# Altium PCB wisp-6.PcbDoc
Units mil, origin at the board's own origin, x right, y up, seen from the top; angles counter-clockwise.
Board outline 1302.99 x 5829.89 mil, 4 copper layers (Top Layer, Mid-Layer 1, Mid-Layer 2, Bottom Layer); 65 components, 63 nets, 256 pads, 67 vias.
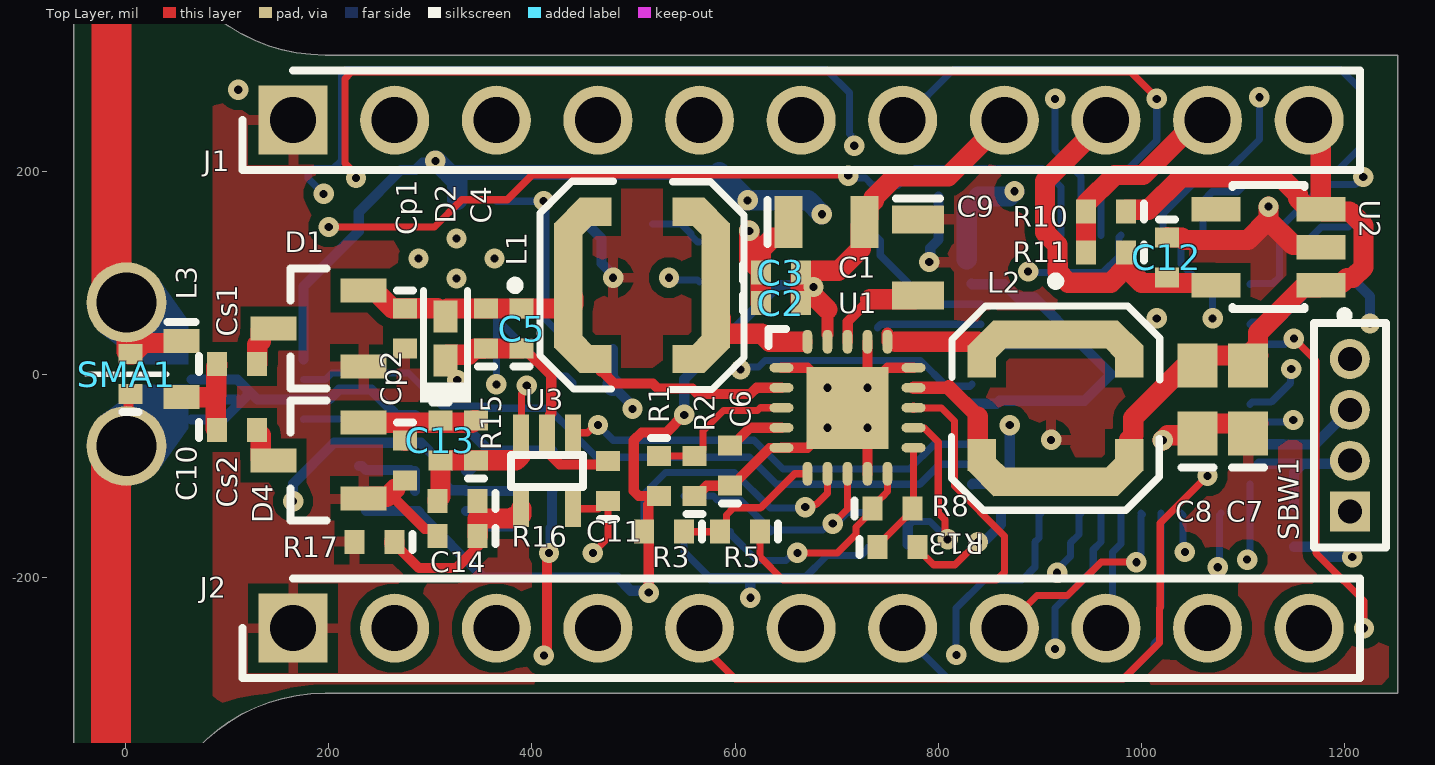
[diagram p0: Top Layer view]
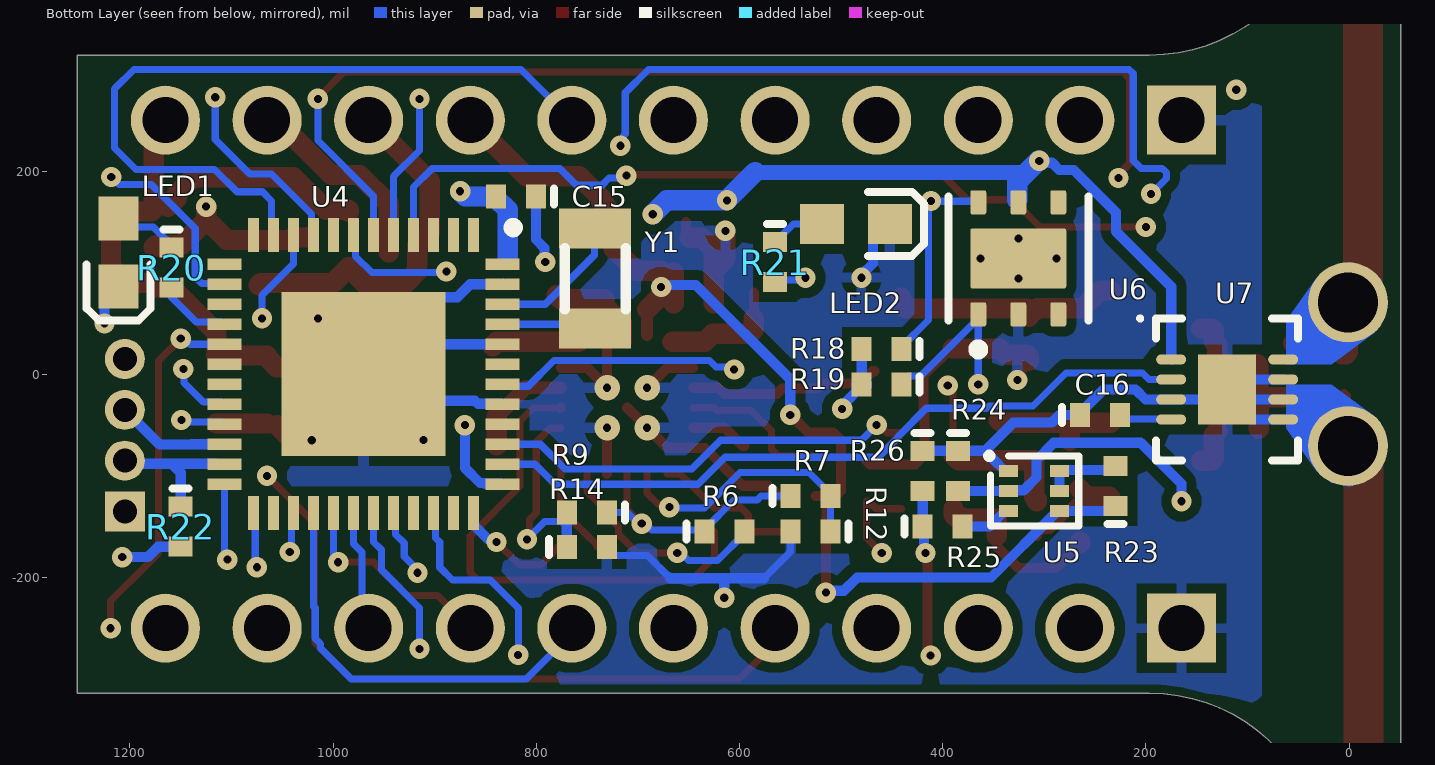
[diagram p1: Bottom Layer view, seen from below]
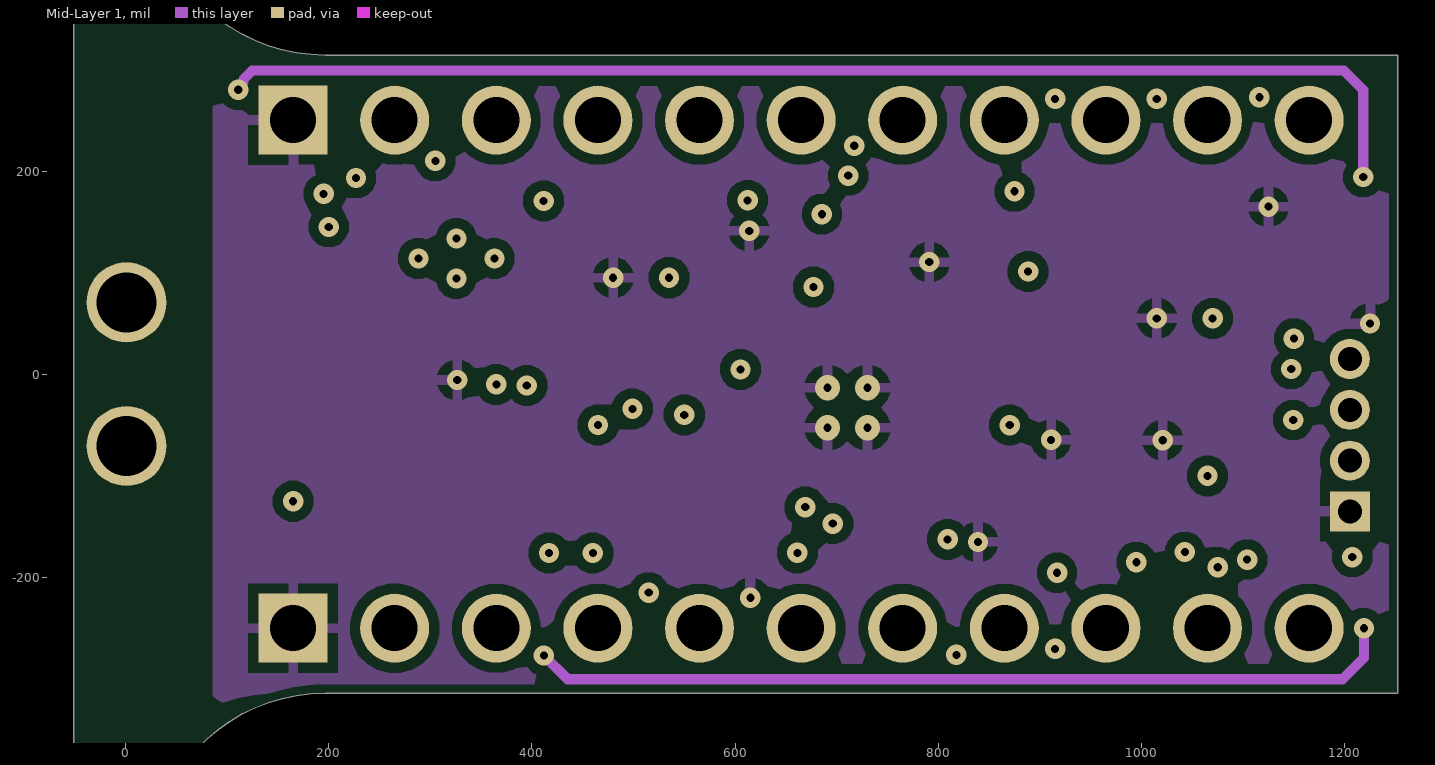
[diagram p2: Mid-Layer 1]
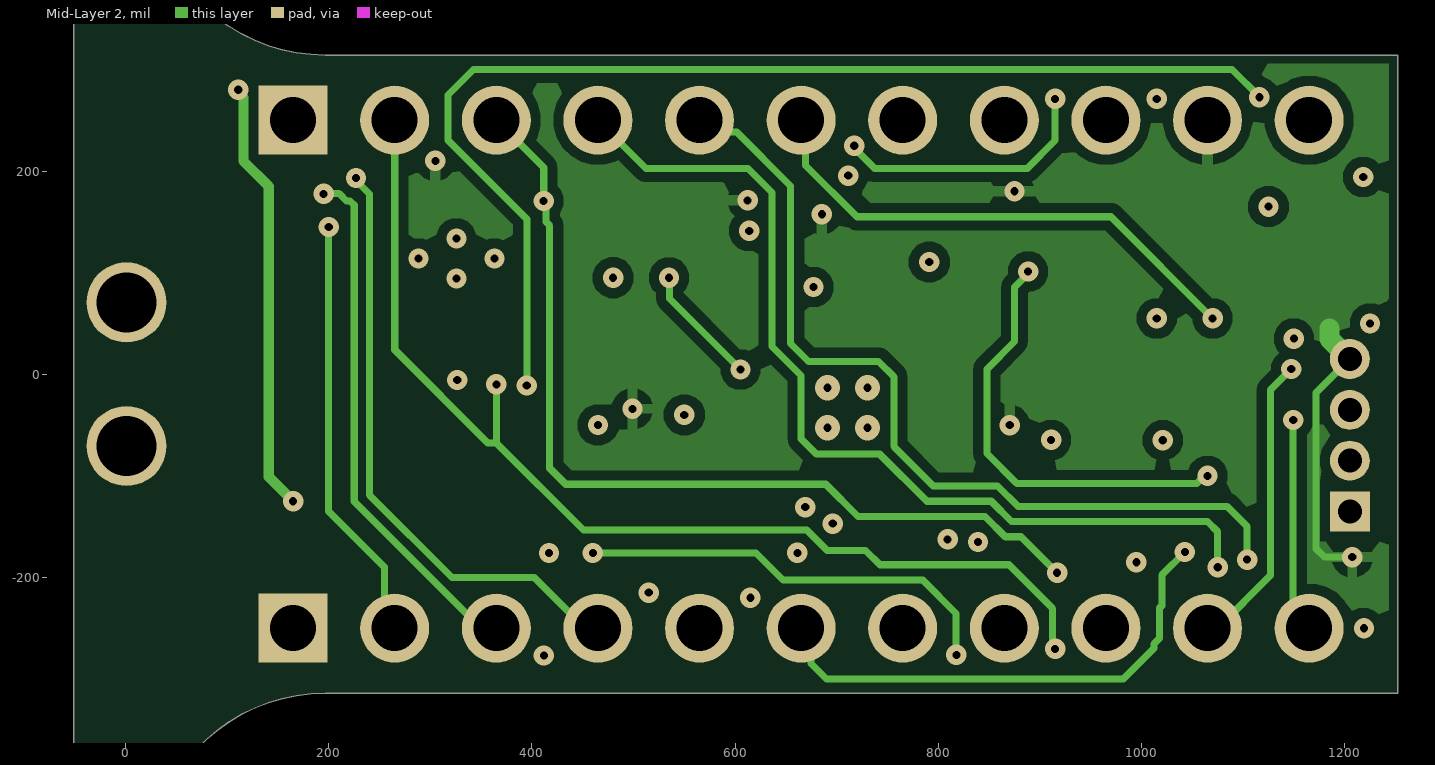
[diagram p3: Mid-Layer 2]

## Layer stack, top to bottom
Top Solder: solder mask 0.4, Solder Resist, Dk 3.5
Top Layer: signal copper 1.4
Dielectric 1: dielectric 12.6, FR-4, Dk 4.8
Mid-Layer 1: signal copper 1.4
Dielectric3: dielectric 12.6, FR-4, Dk 4.8
Mid-Layer 2: signal copper 1.4
Dielectric2: dielectric 12.6, FR-4, Dk 4.8
Bottom Layer: signal copper 1.4
Bottom Solder: solder mask 0.4, Solder Resist, Dk 3.5

## Board outline
-50.99,-2875.73 -50.99,2874.27 cw(c-13.49,2876.77) 24.01,2874.27 24.01,2874.28 24.01,486.61 ccw(c196.48,486.61) 196.48,314.15 1252,314.15 1252,-314.15 196.48,-314.15 196.48,-314.01 ccw(c196.48,-486.47) 24.01,-486.47 24.01,-2875.73 cw(c-13.49,-2878.23)

## Design rules (kind name [scope] priority, off if disabled: settings)
BoardOutlineClearance BoardOutlineClearance_1 [(OnLayer('Bottom Overlay') AND OnLayer('Top Overlay'))] p1: gap=8.5 ignorepadtopadclearanceinfootprint=FALSE except(5: Track-OutlineEdge Track-CavityEdge Track-CutoutEdge Track-SplitBarrior Track-SplitContinuation Text-OutlineEdge Text-CavityEdge Text-CutoutEdge Text-SplitBarrior Text-SplitContinuation)
BoardOutlineClearance [Not OnLayer('Bottom Overlay') AND  Not OnLayer('Top Overlay')] p2: gap=8.5 ignorepadtopadclearanceinfootprint=FALSE except(5: Text-OutlineEdge Text-CavityEdge Text-CutoutEdge Text-SplitBarrior Text-SplitContinuation)
Clearance [All] p1: gap=10 ignorepadtopadclearanceinfootprint=FALSE except(0: Arc-Hole Track-Hole SMDPad-Hole THPad-Hole Via-Hole Fill-Hole Poly-Hole Region-Hole Text-Hole; 5: Text-Text; 6: SMDPad-SMDPad; 8: Arc-Arc Arc-Track Arc-SMDPad Track-Track Track-SMDPad; 9: Arc-Via Track-Via SMDPad-Via)
HoleSize [All] p1: absolutevalues=TRUE maxlimit=248.03 minlimit=7.87 maxpercent=80.000 minpercent=20.000
HoleToHoleClearance [All] p1: gap=19.68 allowstackedmicrovias=TRUE
MinimumSolderMaskSliver [All] p1: minsoldermaskwidth=1
PolygonConnect [All] p1: connectstyle=Relief reliefconductorwidth=10 reliefentries=4 polygonreliefangle="90 Angle" airgapwidth=10
RoomDefinition wisp-6-main [InComponentClass('wisp-6-main')] p1 off: confinementstyle=ConfineIn formatcopy=TRUE lockcomponents=FALSE outline -170,-3950 1830,-3950 1830,-2950 -170,-2950
RoomDefinition U_wisp-6-peripherals [InComponentClass('U_wisp-6-peripherals')] p2 off: confinementstyle=ConfineIn formatcopy=TRUE lockcomponents=FALSE outline -170,-3950 1830,-3950 1830,-2950 -170,-2950
RoomDefinition U_wisp-6-mcu [InComponentClass('U_wisp-6-mcu')] p3 off: confinementstyle=ConfineIn formatcopy=TRUE lockcomponents=FALSE outline -170,-3950 1830,-3950 1830,-2950 -170,-2950
RoomDefinition U_wisp-6-afe [InComponentClass('U_wisp-6-afe')] p4 off: confinementstyle=ConfineIn formatcopy=TRUE lockcomponents=FALSE outline -170,-3950 1830,-3950 1830,-2950 -170,-2950
RoutingVias [All] p1: holewidth=8 width=20 viastyle="Through Hole" minholewidth=8 minwidth=20 maxholewidth=28 maxwidth=50
SilkToSilkClearance [All] p1: silktosilkclearance=5
SilkToSolderMaskClearance [IsPad] p1: minsilkscreentomaskgap=1 clearancetoexposedcopper=TRUE
SolderMaskExpansion [All] p1: expansion=4 istentingtop=FALSE
Width [All] p1: maxlimit=20 minlimit=7 preferedwidth=10
25 further rules are at their usual default settings.

## Classes and differential pairs
component class wisp-6-main: J1 J2
component class U_wisp-6-peripherals: R23 R24 R25 R26 U5 U6
component class U_wisp-6-mcu: C15 LED1 LED2 R18 R19 R20 R21 R22 SBW1 U4 Y1
component class U_wisp-6-afe: C1 C2 C3 C4 C5 C6 C7 C8 C9 C10 C11 C12 C13 C14 C16 Cp1 Cp2 Cs1 Cs2 D1 D2 D4 L1 L2 L3 R1 R2 R3 R5 R6 R7 R8 R9 R10 R11 R12 R13 R14 R15 R16 R17 SMA1 U1 U2 U3 U7

## Components (designator, comment, footprint, x,y, rotation, side; value= is the part's Value field where it differs from the comment)
C1 "Cap" 0805 690,150 r0 top value=100uF
C2 "Cap" 0402 645,70 r0 top value=4.7uF
C3 "Cap" 0402 645,100 r0 top value=0.1uF
C4 "Cap" 0402 355,45 r90 top value=0.1uF
C5 "Cap" 0402 390,45 r90 top value=4.7uF
C6 "Cap" 0402 595,-90 r90 top value=0.01uF
C7 "Cout1" 0603-W 1105,-25 r90 top value=22uF
C8 "Cout2" 0603-W 1055,-25 r90 top value=DNP
C9 "Cap" 0805 780,115 r270 top value=100u
C10 "Cap" 0402 5,0 r90 top value=5.6pF
C11 "Cap" 0402 475,-105 r90 top value=10000pF
C12 "Cap" 0402 1025,115 r270 top value=1u
C13 "Cap" 0402 310,-65 r270 top value=33pF
C14 "Cap" 0402 327,-159 r180 top value=1nF
C15 "Cap" 0402 820,175 r0 bottom value=4.7uF
C16 "Cap" 0402 245,-40 r180 bottom value=47pF
Cp1 "Cap" 0402 275,45 r270 top value=33pF
Cp2 "Cap" 0402 275,-85 r270 top value=10pF
Cs1 "Cap" 0402 110,10 r0 top value=33pF
Cs2 "Cap" 0402 110,-55 r0 top value=1pF
D1 "SMS7630-005LF" "SOT23 - N" 190,45 r180 top
D2 "Zener_SOD-523" Zener_SOD-523 315,35 r0 top
D4 "SMS7630-005LF" "SOT23 - N" 190,-85 r180 top
J1 "22-28-4110" 0.1_inch_11_Position 165,250 r0 top
J2 "22-28-4110" 0.1_inch_11_Position 165,-250 r0 top
L1 "Ind_LPS4018" LPS4018 500,92 r90 top value=22uH
L2 "Ind_LPS4018" LPS4018 920,-25 r0 top value=10uH
L3 "Ind" 0603 55,5 r270 top value=16nH
LED1 "LED" "Diode - 0603" 1211,120 r90 bottom
LED2 "LED" "Diode - 0603" 485.45,148.02 r0 bottom
R1 "R_80%" 0402 525,-100 r270 top value=0
R2 "R_50%" 0402 560,-100 r90 top value=DNP
R3 "R_EN" 0402 530,-155 r180 top value=DNP
R5 "R_VBAT_OK" 0402 605,-155 r180 top value=0
R6 "Rok3" 0402 615,-155 r180 bottom value=1M
R7 "Rov2" 0402 530,-120 r180 bottom value=7.5M
R8 "Rok2" 0402 755,-132 r0 top value=5.52M
R9 "Rout2" 0402 750.31,-136 r0 bottom value=8.28M
R10 "Res" 0402 965,160 r180 top value=DNP
R11 "Res" 0402 965,120 r180 top value=0
R12 "Rov1" 0402 530,-155 r0 bottom value=5.76M
R13 "Rok1" 0402 760,-170 r0 top value=3M
R14 "Rout1" 0402 750.31,-170 r180 bottom value=4.7M
R15 "Res" 0402 345,-65 r90 top value=560k
R16 "Res" 0402 327,-125 r180 top value=22k
R17 "Res" 0402 245,-165 r180 top value=220k
R18 "Res" 0402 460,25 r0 bottom value=100k
R19 "Res" 0402 460,-10 r0 bottom value=100k
R20 "Res" 0402 1159,105 r270 bottom value=33
R21 "Res" 0402 565,110.31 r270 bottom value=33
R22 "Res" 0402 1150,-150 r270 bottom value=47k
R23 "Res" 0402 230,-110 r90 bottom value=100k
R24 "Res" 0402 385,-95 r270 bottom value=47k
R25 "Res" 0402 400,-150 r180 bottom value=100k
R26 "Res" 0402 420,-95 r270 bottom value=100k
SBW1 "MHDR1X4" MHDR1X4 1205,-135 r90 top
SMA1 "SMA - Hole - 2 Pin" "SMA - Hole - 2 Pin" 1,0 r180 top
U1 "BQ25570" BQ25570 710.63,-33 r0 top
U2 "TPS7A0218PDBVR" SOT23-5 1125,125 r90 top
U3 "Comparator" SC70-5 415,-95 r180 top
U4 "MSP430 Wolverine 48-Pin" MSP_QFN48_RGZ_PAD0 970,0 r270 bottom
U5 "SI1016X" "SC-89-6 Vishay" 310,-115 r180 bottom
U6 "HDC2080DMBT" FP-DMB0006A-MFG 325.63,114 r90 bottom
U7 "ADG901BCPZ-500RL7" ADI-CP-8-2_L 120,-15 r180 bottom
Y1 "XTAL" "XTAL [3.20mm x 1.50mm]" 742,94 r90 bottom value=32.768kHz

## Footprints (in the part's own frame and the unit in brackets; to place one, negate y for a bottom-side part, rotate by r counter-clockwise, add the part's x,y. Pads: shape width x height; smd on the part's side, far side on the other; paste and mask are expansions set on the pad)
0.1_inch_11_Position [mm] "0.1 inch (2.54mm) 11 position header"
  rect 1.725x1.725 hole 1.15: 1(0,0)
  round 1.725 hole 1.15: 2(2.54,0) 3(5.08,0) 4(7.62,0) 5(10.16,0) 6(12.7,0) 7(15.24,0) 8(17.78,0) 9(20.32,0) 10(22.86,0) 11(25.4,0)
  silkscreen extent -1.27,-1.24 26.67,1.24, body extent -1.27,-1.24 26.67,1.24, height 8.38
0402 [mm] "Surface Mount; Body 1 x 0.5 mm (LxW typ)"
  rect 0.5x0.6 smd: 1(-0.5,0) 2(0.5,0)
  silkscreen extent -0.95,-0.2 -0.95,0.2, body extent -0.5,-0.25 0.5,0.25, height 0.5
0603 [mm] "Surface Mount; Body 1.6 x 0.8 mm (LxW typ)"
  rect 0.6x0.9 smd: 1(-0.7,0) 2(0.7,0)
  silkscreen extent -1.17,-0.35 -1.17,0.35, body extent -0.8,-0.4 0.8,0.4, height 0.8
0603-W [mm] "Surface Mount - Wide; Body 1.6 x 0.8 mm (LxW typ)"
  rect 1.1x1 smd: 1(-0.85,0) 2(0.85,0)
  silkscreen extent -1.7,-0.4 -1.7,0.4, body extent -0.8,-0.4 0.8,0.4, height 0.8
0805 [mm] "Surface Mount; Body 2.0 x 1.25 mm (LxW typ)"
  rect 0.7x1.3 smd: 1(-0.95,0) 2(0.95,0)
  silkscreen extent -1.48,-0.55 -1.48,0.55, body extent -1,-0.63 1,0.63, height 1.25
ADI-CP-8-2_L [mm] "SON, 8-Leads, Body 3x3mm, Pitch 0.5mm, Thermal Pad 1.75x1.45mm, IPC High Density"
  oval 0.75x0.25 smd: 1(-1.4,0.75) 2(-1.4,0.25) 3(-1.4,-0.25) 4(-1.4,-0.75) 5(1.4,-0.75) 6(1.4,-0.25) 7(1.4,0.25) 8(1.4,0.75)
  rect 1.45x1.75 smd: 9(0,0)
  silkscreen extent -2.22,-1.77 1.78,1.82, body extent -1.63,-1.62 1.63,1.63, height 0.9
BQ25570 [mm] "Boost Charger"
  oval 0.6x0.24 smd paste-0.025 mask+0.07: 1(-1.65,1) 2(-1.65,0.5) 3(-1.65,0) 4(-1.65,-0.5) 5(-1.65,-1) 11(1.65,-1) 12(1.65,-0.5) 13(1.65,0) 14(1.65,0.5) 15(1.65,1)
  oval 0.24x0.6 smd paste-0.025 mask+0.07: 6(-1,-1.65) 7(-0.5,-1.65) 8(0,-1.65) 9(0.5,-1.65) 10(1,-1.65) 16(1,1.65) 17(0.5,1.65) 18(0,1.65) 19(-0.5,1.65) 20(-1,1.65)
  rect 2.05x2.05 smd paste-1.025 mask+0.07: 21(0,0)
  silkscreen extent -1.97,1.54 -1.54,1.98, body extent -1.82,-1.82 1.83,1.83, height 1.01
"Diode - 0603" [mm] "Diode: Body 1.6 x 0.8 mm (LxW typ)"
  rect 1.1x1 smd: 1(0.85,0) 2(-0.85,0)
  silkscreen extent -1.7,-0.8 -0.3,0.8
FP-DMB0006A-MFG [mm]
  rrect25% 0.6x0.4 smd paste+0 mask+0: 1(-1.4,1) 2(-1.4,0) 3(-1.4,-1) 4(1.4,-1) 5(1.4,0) 6(1.4,1)
  rrect7% 1.5x2.4 smd paste-1000 mask+0: 7(0,0)
  silkscreen extent -2.4,-1.75 1.55,1.75, body extent -1.5,-1.5 1.5,1.5, height 0.8
LPS4018 [mil] "Inductor"
  rect 28x31.5 smd: 1(-77.03,37.61) 1(67.97,37.61) 2(-77.03,-54.39) 2(67.97,-54.39)
  rect 35.5x28 smd rot 45: 1(-68.53,55.61) 2(59.47,-72.39)
  rect 123x28 smd: 1(-4.53,64.11) 2(-4.53,-80.89)
  rect 35.5x28 smd rot 135: 1(59.47,55.61) 2(-68.03,-72.89)
  silkscreen extent -107,-109 98,120, body extent -85,-89 76,72, height 71
MHDR1X4 [mm] "Connector; Header; 4 Position"
  rect 1x1 hole 0.6: 1(0,0)
  round 1 hole 0.6: 2(1.27,0) 3(2.54,0) 4(3.81,0)
  silkscreen extent -0.9,-0.9 4.71,0.9
MSP_QFN48_RGZ_PAD0 [mm]
  rect 4.1x4.1 smd: 0(0,0)
  rect 0.85x0.28 smd: 1(-3.475,2.75) 2(-3.475,2.25) 3(-3.475,1.75) 4(-3.475,1.25) 5(-3.475,0.75) 6(-3.475,0.25) 7(-3.475,-0.25) 8(-3.475,-0.75) 9(-3.475,-1.25) 10(-3.475,-1.75) 11(-3.475,-2.25) 12(-3.475,-2.75) 25(3.475,-2.75) 26(3.475,-2.25) 27(3.475,-1.75) 28(3.475,-1.25) 29(3.475,-0.75) 30(3.475,-0.25) 31(3.475,0.25) 32(3.475,0.75) 33(3.475,1.25) 34(3.475,1.75) 35(3.475,2.25) 36(3.475,2.75)
  rect 0.28x0.85 smd: 13(-2.75,-3.475) 14(-2.25,-3.475) 15(-1.75,-3.475) 16(-1.25,-3.475) 17(-0.75,-3.475) 18(-0.25,-3.475) 19(0.25,-3.475) 20(0.75,-3.475) 21(1.25,-3.475) 22(1.75,-3.475) 23(2.25,-3.475) 24(2.75,-3.475) 37(2.75,3.475) 38(2.25,3.475) 39(1.75,3.475) 40(1.25,3.475) 41(0.75,3.475) 42(0.25,3.475) 43(-0.25,3.475) 44(-0.75,3.475) 45(-1.25,3.475) 46(-1.75,3.475) 47(-2.25,3.475) 48(-2.75,3.475)
  silkscreen extent -3.78,3.63 -3.55,3.85, body extent -3.3,-3.3 3.3,3.3, height 1
SC70-5 [mm] "SC70-5"
  rect 0.4x0.92 smd: 1(-0.65,-0.95) 2(0,-0.95) 3(0.65,-0.95) 4(0.65,0.95) 5(-0.65,0.95)
  silkscreen extent -0.9,-0.4 0.9,0.4
"SC-89-6 Vishay" [mm]
  rect 0.478x0.3 smd: 1(-0.638,0.5) 2(-0.638,0) 3(-0.638,-0.5) 4(0.638,-0.5) 5(0.638,0) 6(0.638,0.5)
  silkscreen extent -1.15,-0.87 1.11,0.91
"SMA - Hole - 2 Pin" [mm] "SMA port for wisp"
  round 2 hole 1.5: 1(0,1.796) 2(0,-1.796)
  silkscreen extent -1.02,0 1.02,0
"SOT23 - N" [mm] "SOT23, 3-Leads, Body 2.9x1.3mm, Pitch 0.95mm, Lead Span 2.3mm - Reverse Pinning, IPC Medium Density"
  rect 1.15x0.6 smd: 1(-1.125,0.95) 2(-1.125,-0.95) 3(1.125,0)
  silkscreen extent -0.2,-1.5 0.7,1.5, body extent -0.7,-1.5 0.7,1.5, height 1.1
SOT23-5 [mm] "SOT23-5"
  rect 0.62x1.22 smd: 1(-0.95,-1.31) 2(0,-1.31) 3(0.95,-1.31) 4(0.95,1.31) 5(-0.95,1.31)
  silkscreen extent -1.8,-2 1.55,0.9, body extent -1.55,-0.9 1.55,0.9, height 1
"XTAL [3.20mm x 1.50mm]" [mm] "FC-135   crystal - epson eletronics"
  rect 1x1.8 smd: 1(-1.25,0) 2(1.25,0)
  silkscreen extent -0.76,-0.76 0.76,0.76
Zener_SOD-523 [mm] "Zener Diod"
  rect 0.6x0.8 smd paste-0.05: 1(0,-0.55) 2(0,0.55)
  silkscreen extent -0.63,-1.6 0.64,1.2, body extent -0.4,-0.8 0.4,0.8, height 0.72

## Part data
C1 C2 C3 C4 C5 C6 C9 C10 C11 C12 C13 C14 C15 C16 Cp1 Cp2 Cs1 Cs2: "Ceramic Capacitor (Surface Mount)", Manufacturer="Generic Ceramic Chip Cap (TBD)"
C7 C8: library part Cap, "Ceramic Capacitor (Surface Mount)", Manufacturer="Generic Ceramic Chip Cap (TBD)", Comment_1=Cap
D1 D4: "Schottky Diodes & Rectifiers Ls=1.5nH SOT-23 Series Pair"
D2: "Diode - Zener"
J1 J2: library part 11_Pos
L1 L2: "Inductor (Surface Mount)", Manufacturer="Coil Craft"
L3: "Inductor (Surface Mount)"
LED1 LED2: library part "Diode - LED", "Typical RED, GREEN, YELLOW, AMBER GaAs LED"
R1 R2 R3 R5 R6 R7 R8 R9 R12 R13 R14: library part Res, "Chip Resistor (Surface Mount)", Manufacturer="Generic Chip Res (TBD)", Comment_1=Res
R10 R11 R15 R16 R17 R18 R19 R20 R21 R22 R23 R24 R25 R26: "Chip Resistor (Surface Mount)", Manufacturer="Generic Chip Res (TBD)"
SBW1: "Header, 4-Pin", LatestRevisionDate=17-Jul-2002, LatestRevisionNote="Re-released for DXP Platform.", Publisher="Altium Limited"
SMA1: "Two pin SMA connector wisp", Note="This part is used to attach the antennae to WISP in the layout"
U1: "Boost Charger", Digi-Key Part Number=296-37014-1-ND, Manufacturer="Texas Instruments", Manufacturer Part Number=bq25570
U2: "IC REG LINEAR 1.8V 200MA SOT23-5"
U3: library part NCS2200, "Comparator: On Semi 10uA Comparator", Digi-Key Part Number=NCS2200SQ2T2GOSTR-ND, Manufacturer="ON Semiconductor", Manufacturer Part Number=NCS2200SQ2T2G
U4: library part MSP430FR596X_586X_RGZ, "16-bit FRAM MCU", Manufacture="Texas Instrument", PartNumber=MSP430FR5969, Datasheet Link=http://www.ti.com/lit/gpn/msp430fr5969
U5: "NMOS and PMOS array"
U6: library part CMP-04948-000026-1, "HUMIDITY SENSOR", Max Operating Temperature=85°C, Min Operating Temperature=-40°C, Accuracy=2%, Interface=I2C, Mount="Surface Mount", Output Type=I2C, Packaging="Tape and Reel", Response Time=8s, Sensor Type=Temperature
U7: library part CMP-0290-00015-1, "RF Switch, Wideband, 40 dB Isolation at 1 GHz, CMOS 1.65 V to 2.75 V, SPST Switches, CP-8-2, Pb-Free, 500 Reel", Off Isolation Test Freq=1G, Supply Voltage="Single (+1.65V to +2.75V)", # Sw Functions=1, Bandwidth=4.5GHz, ComponentLink1Description="Manufacturer URL", ComponentLink1URL=www.analog.com, ComponentLink2Description=Datasheet, ComponentLink2URL=http://www.analog.com/static/imported-files/data_sheets/ADG901_902.pdf, ComponentLink3Description="Package Specification", ComponentLink3URL=http://www.analog.com/static/imported-files/packages/56953322593982CP_8_2.pdf, Configuration=SPST/NO, DatasheetVersion=RevB, Insertion Loss (dB)=800mdB, Off Isolation=37dB, P-1dB (dBm)=17, PackageDescription="8-Lead Lead Frame Chip Scale Package [LFCSP_VD]", PackageReference=CP-8-2, PackageVersion=061507-B
Y1: library part "XTAL 2-pins", "Crystal Oscillator - [3.20mm x 1.50mm]", Digi-Key Part Number="example: SE2413CT-ND", Manufacturer="Epson Toyocom Corporation", Manufacturer Part Number="FC-135 32.7680KA-A3"

## Via types
v1: diameter 20, hole 8, Top Layer to Bottom Layer, 54 vias
v2: diameter 20, hole 8, Top Layer to Bottom Layer, tented both sides, 5 vias
v3: diameter 19.68, hole 7.87, Top Layer to Bottom Layer, 4 vias
v4: diameter 25, hole 8, Top Layer to Bottom Layer, 4 vias

## Nets (pads, with @x,y where several pads share a name; then routed paths per layer and width w, separated by ;. In a path a pad name is that pad's centre, name@x,y a point inside that pad or via, vN(x,y) a via of type N, cw(c..) or ccw(c..) an arc to the next point about the centre after c; other vN are vias at no path point)
1V8: C12.2 J1.9 R11.1 U2.5 | length 354.1
  Top Layer w20: J1.9 905,190 905,139.85 917.31,127.53 917.31,108.4 917.47,108.24 917.47,100.73 928.02,90.19 969.72,90.19 984.68,105.16 984.68,103.35 984.84,103.19 986.65,103.19 1000.04,89.8 1025,89.8 1071.22,89.8 U2.5
3V3: C7.2 C8.2 J1.11 L2.2 R10.1 U1.14 U2.1 U2.3 | length 830.2
  Top Layer w12: U1.14 810.64,-13.31
  Top Layer w15: 810.64,-13.31 838.97,-41.65
  Top Layer w20: L2.2@838.97,-70 838.97,-41.65 ; R10.1 984.68,161.65 984.84,161.81 1006.81,161.81 1039,194 1137.01,194 1154,177.01 1154,173.17 U2.3@1162.56,164.61 ; L2.2@987.97,-64.39 991.97,-60.39 991.97,-43.03 1041.81,6.81 1055.31,6.81 1065,16.5 1065,18.46 C7.2@1105,18.46 ; C7.2@1114.69,20.43 C7.2@1114.69,28.15 ; C7.2@1115,18.46 C7.2@1105,18.46 ; J1.11 1176.57,238.43 U2.3 1178.78,160.2 1204.8,160.2 1218.59,146.41 1218.59,105.34 1208.05,94.8 1202.31,94.8 1197.31,89.8 1178.78,89.8 U2.1 1174.37,85.39 1159.38,85.39 1114.69,40.7 1114.69,30.12 C7.2@1114.69,28.15 ; C7.2@1105,18.46 C7.2@1114.69,28.15
ANT: C10.2 L3.1 SMA1.2 U7.8 | length 112.6
  Top Layer w20: SMA1.2@-3.29,75 SMA1.2 1,22.03 C10.2@3.35,19.69 ; C10.2 6.65,19.69 17.72,30.75 L3.1@55,30.75
BITLINE: C13.2 R15.1 R16.2 U3.3 U4.9 | length 1498.3
  Top Layer w7: U3.3 389.7,-57.3 389.7,-18.81 394.98,-13.54 v1(394.98,-11.02)
  Top Layer w20: R16.2 307.31,-123.35 310,-120.66 C13.2 R15.1 384.44,-84.68 389.13,-80
  Mid-Layer 2 w7: v1(394.98,-11.02) 395,152.89 317.54,230.34 317.54,274.94 342.6,300 1089.09,300 1116.01,273.09 v1(1116.01,272.61)
  Bottom Layer w7: U4.9 1021.22,138.82 1021.22,157.65 1060.55,196.97 1081.97,196.97 1116.01,231.01 v1(1116.01,272.61)
BITLINE_LPF: C14.1 R16.1 R17.1 U3.4 | length 169.7
  Top Layer w10: R17.1@264.69,-166.65 288.84,-190.81 325.44,-190.81 C14.1@346.68,-169.57
  Top Layer w20: R17.1@264.69,-166.65 R17.1 ; C14.1 346.68,-142 379.81,-142 381.3,-140.51 387.28,-140.51 389.41,-138.39 U3.4
GND: C1.1 C2.1 C3.1 C4.1 C5.1 C6.1 C7.1 C8.1 C9.1 C10.1 C11.2 C12.1 C14.2 C15.1 C16.1 Cp1.2 Cp2.2 D1.1 D2.1 D4.1 J1.1 J2.1 LED1.2 LED2.2 R2.1 R12.2 R13.2 R14.2 R17.2 R24.1 R26.1 SBW1.1 SMA1.1 U1.1 U1.5 U1.9 U1.15 U1.17 U1.21 U2.2 U3.2 U4.0 U4.36 U4.41 U4.44 U4.47 U5.1 U6.2 U7.3 U7.5 U7.6 U7.7 U7.9 | length 2779.4
  Top Layer w7: D2.1 315,9.41 324.03,0.38 324.03,-3.17 v1(326.52,-5.66) ; R13.2 779.69,-171.97 795.26,-187.54 816.59,-187.54 v1(839.09,-165.04)
  Top Layer w10: SMA1.1 3,-68.71 3,-21.68 C10.1 ; Cp2.2@265.39,-112.64 265.39,-123.12 294.47,-152.19 302.47,-152.19 307.31,-157.03 C14.2 ; C5.1 391.97,25.32 404.3,12.98 404.92,12.98 419,-1.09 419,-38.63 417.87,-39.76 417.87,-54.72 U3.2 417.87,-60.47 417.87,-79.25 427.33,-88.71 471.61,-88.71 C11.2 ; R2.1 561.97,-119.68 571.97,-109.68 C6.1 596.97,-109.68 634.01,-72.65 645.39,-72.65 U1.5 671.26,-72.37 v4(690.94,-52.68) U1.21 ; U1.1 671.26,6.37 v4(690.94,-13.31) ; C1.1@648.82,134.41 652.6,138.19 C1.1 ; U1.9 v4(730.31,-52.68) ; U1.17 v4(730.31,-13.31) 750,6.37 U1.15 ; C8.1@1040.31,-65 1045.2,-60.12 1055,-50.31 C8.1@1055,-48.46
  Top Layer w20: D4.1 236.1,-120.59 257.44,-120.59 Cp2.2@265.39,-112.64 ; D2.1 315,17.28 316.81,19.09 337.85,19.09 343.92,25.16 353.19,25.16 353.35,25.32 C4.1 C5.1 ; v1(613.89,141.16) 613.89,113.08 C3.1@625.32,101.65 ; C2.1 C3.1 C3.1@625.32,101.65 ; C1.1@648.82,134.41 637.03,134.41 625.32,122.69 C3.1@625.32,101.65 ; v1(1020.97,-65) 1025.85,-60.12 1045.2,-60.12 1045.31,-60.12 1055,-50.43 C8.1@1055,-50.31 ; C12.1 1025.16,134.53 1039.62,134.53 1041.95,132.2 1104.9,132.2 1125,152.3 ; C8.1@1065,-48.46 C7.1@1115,-48.46 ; v2(1125,165) 1125,152.3 ; U2.2 1174.37,127.21 1149.24,127.21 1125,151.44 1125,152.3
  Bottom Layer w7: R12.2 549.69,-174.69 575.8,-200.8 ; 668.09,-200.8 690.58,-178.31 724.29,-178.31 730.63,-171.97 R14.2
  Bottom Layer w10: U7.5 96.38,-44.53 120,-20.91 U7.9 ; U7.6 U7.9@110.16,-24.84 ; U7.7 110.16,-5.16 U7.9 ; U5.1 338.62,-95.32 351.12,-82.82 351.12,-82.39 358.19,-75.32 ; R26.1 R24.1 358.19,-75.32 ; LED2.2 453.96,148.02 468.64,133.34 468.64,109.06 480,97.71 v1(480,95) ; 575.8,-200.8 615,-200.8 ; v1(615,-220) 615,-200.8 ; 668.09,-200.8 615,-200.8 ; v1(791.15,110.38) 792.03,111.26 792.03,124.3 800.32,132.59 C15.1 ; U4.47@832.68,89.09 U4.47 864.92,88.58 877.8,75.71 894.29,75.71 U4.0@940.47,29.53 ; U4.41 833.7,-29.02 857.42,-29.02 860.35,-26.09 943.91,-26.09 U4.0 U4.0@940.47,29.53 ; U4.44 U4.0@940.47,29.53 ; v1(839.09,-165.04) 841,-163.13 846.63,-163.13 861.73,-148.03 U4.36 ; LED1.2@1215,86.54 1225,76.54 v1(1225,50) ; U7.9 129.84,-24.84 U7.3 200.43,-24.84 210.09,-15.19 241.84,-15.19 264.69,-38.03 C16.1 285,-40 292.64,-47.64 330.52,-47.64 358.19,-75.32
  other v1: 911.04,-64.57 1015,55
I2C_SCL: J1.3 R18.1 U4.32 U6.6 | length 1176
  Mid-Layer 2 w7: J1.3 411.62,203.38 411.62,170.62 v1(411.55,170.54) 414,168.09 414,150.04 417.5,146.54 417.5,-92.5 433.31,-108.31 689.22,-108.31 720.9,-140 845.99,-140 865.99,-160 881.54,-160 v1(916.98,-195.44)
  Bottom Layer w7: U6.6@365,170.24 411.24,170.24 v1(411.55,170.54) ; v1@414,168.62 414,53.28 440.32,26.97 R18.1 ; v1(916.98,-195.44) 916.98,-192.4 929.96,-179.42 929.96,-166.15 938.46,-157.65 938.46,-138.82 U4.32
I2C_SDA: J1.2 R19.1 U4.31 U6.1 | length 1401.8
  Mid-Layer 2 w7: J1.2 265,24.04 356.6,-67.57 365,-67.57 ; v1(365,-10) 365,-67.57 ; v1(915,-270.28) 912.51,-267.79 912.51,-230.4 869.66,-187.54 742.54,-187.54 728.37,-173.37 690.63,-173.37 670.58,-153.31 450.75,-153.31 365,-67.57
  Bottom Layer w7: v1(365,-10) U6.1@365,54.94 ; U6.1 U6.1@365,54.94 ; R19.1 440.32,-8.03 433.97,-1.69 421.63,-1.69 U6.1@365,54.94 ; v1(915,-270.28) 915,-230 952.5,-192.5 952.5,-172.76 960.16,-165.11 U4.31
LED1: R20.2 U4.16 | length 63.6
  Bottom Layer w7: U4.16 1108.82,51.22 1134.4,51.22 R20.2@1159.25,76.07
LED2: R21.2 U4.42 | length 397.7
  Mid-Layer 2 w7: v1(534.99,95) 535.5,94.49 535.5,74.5 v1(605.29,4.71)
  Bottom Layer w7: v1@538.51,95 v1(534.99,95) 537.18,92.81 562.82,92.81 R21.2 ; v1(605.29,4.71) 607.78,7.2 622.99,7.2 629.4,13.6 782.46,13.6 807.91,-11.85 831.18,-11.85 U4.42
NetC6_2: C6.2 U1.4 | length 58
  Top Layer w10: C6.2 596.97,-70.31 614.6,-52.68 U1.4
NetC9_2: C9.2 U1.18 | length 99.8
  Top Layer w10: U1.18 710.91,32.24 710.91,51.96 732.76,73.82
  Top Layer w20: 732.76,73.82 776.22,73.82 C9.2
NetC11_1: C11.1 U3.5 U4.34 | length 714.1
  Top Layer w7: U3.5 465.31,-132.4 473.03,-124.68 C11.1 475,-161 v1(460,-176)
  Mid-Layer 2 w7: v1(460,-176) 620.67,-176 647.21,-202.54 784.66,-202.54 817.54,-235.43 817.54,-275.91 v1(817.83,-276.2)
  Bottom Layer w7: v1(817.83,-276.2) 817.54,-275.91 817.54,-230.34 845.34,-202.54 882.46,-202.54 895,-190 895,-165.27 899.09,-161.18 899.09,-138.82 U4.34
NetC13_1: C13.1 Cp2.1 D4.2 R15.2 | length 129.4
  Top Layer w20: D4.2 275,-47.6 ; Cp2.1 275,-47.6 ; R15.2 343.35,-45.31 341.06,-47.6 275,-47.6
NetC16_2: C16.2 U7.4 | length 52.1
  Bottom Layer w7: U7.4 175.41,-44.23 221.08,-44.23 C16.2
NetCs1_1: Cs1.1 Cs2.1 L3.2 | length 104.6
  Top Layer w10: 82,-27.56 87.56,-22 88.94,-23.38 ; Cs2.1@88.94,-53.62 Cs2.1
  Top Layer w20: L3.2 87,-22.56 ; Cs2.1@88.94,-53.62 88.94,-23.38 ; 89.37,-20.19 89.37,7.4 90.31,8.35 Cs1.1
NetCs1_2: Cs1.2 D1.3 | length 48
  Top Layer w20: Cs1.2 129.84,10.16 129.84,29.13 133.07,32.36 133.07,43.19 134.88,45 D1.3
NetCs2_2: Cs2.2 D4.3 | length 43
  Top Layer w20: Cs2.2 129.69,-56.65 133.07,-60.04 133.07,-83.19 134.88,-85 D4.3
NetL1_2: L1.2 U1.20 | length 125.9
  Top Layer w10: L1.2@585.89,55.29 L1.2@585.89,80.47 ; U1.20@666.96,31.96 U1.20
  Top Layer w20: L1.2@585.89,55.29 585.89,44 589.89,40 626.18,40 634.22,31.96 665.98,31.96
NetL2_1: L2.1 U1.16 | length 95
  Top Layer w12: U1.16 U1.16@750,40
  Top Layer w20: 758.04,31.96 838.97,31.96 842.97,27.96 L2.1@842.97,27.61
NetLED1_1: LED1.1 R20.1 | length 50.5
  Bottom Layer w7: R20.1@1160,128.03 1176.97,145 LED1.1@1203.46,145
NetLED2_1: LED2.1 R21.1 | length 54.7
  Bottom Layer w7: LED2.1 546.98,148.02 556.69,138.31 556.69,136.34 563.03,130 R21.1
NetR1_1: R1.1 R2.2 U1.3 | length 150.8
  Top Layer w7: R1.1 R2.2 561.97,-80.31 568.31,-73.97 568.31,-56.03 588.55,-35.79 622.07,-35.79 624.86,-33 U1.3
NetR3_1: R3.1 R5.2 U1.6 | length 151.2
  Top Layer w7: R3.1 R5.2 591.41,-148.91 591.41,-138.59 598.56,-131.44 625.18,-131.44 658.66,-97.96 U1.6
NetR5_1: R5.1 U1.13 | length 492.9
  Top Layer w7: R5.1 624.68,-180.01 647.21,-202.54 857.46,-202.54 865,-195 865,-159.13 815.97,-110.11 815.97,-45.97 803.28,-33.28 U1.13@775.87,-33.28
  Top Layer w10: U1.13 U1.13@775.87,-33.28
NetR6_1: R6.1 R7.1 R9.1 U1.8 | length 259.6
  Top Layer w7: v2@696.14,-147.05 710.63,-132.55 U1.8
  Bottom Layer w7: R7.1 578.77,-120 582.46,-123.68 605.34,-123.68 634.68,-153.03 R6.1 636.37,-153.31 686.36,-153.31 692.62,-147.05 699.66,-147.05 710.78,-135.93 R9.1@730.63,-135.93
  other v2: 696.14,-147.05
NetR6_2: R6.2 R8.1 U1.10 | length 218.1
  Top Layer w7: v2(661.26,-175.81) 700.61,-175.81 718.97,-157.45 718.97,-150.43 728.97,-140.43 728.97,-138.34 R8.1 ; R8.1@735.17,-130.17 745.08,-120.27 745.36,-120.27 750.16,-115.47 750.16,-98.12 U1.10
  Bottom Layer w7: R6.2 595.31,-156.97 621.66,-183.31 650.24,-183.31 657.74,-175.81 v2(661.26,-175.81)
NetR7_2: R7.2 R12.1 U1.7 | length 266.2
  Top Layer w7: v2(669,-130.81) 671.48,-128.33 679.81,-128.33 690.94,-117.19 U1.7
  Bottom Layer w7: R12.1 R7.2 510.31,-118.03 531.66,-96.69 599.56,-96.69 634.56,-131.69 668.12,-131.69 v2(669,-130.81)
NetR8_2: R8.2 R13.1 U1.11 | length 115.4
  Top Layer w7: R13.1 740.32,-168.03 746.66,-161.69 746.96,-161.69 774.69,-133.97 R8.2 ; R8.2@774.69,-135 775.59,-134.09 U1.11
NetR9_2: R9.2 R14.1 U1.12 | length 195.8
  Top Layer w7: U1.12 776.06,-53.15 786.41,-53.15 789.4,-56.15 800,-66.75 800,-136.48 806.7,-143.18 806.7,-160.01 v1(809.19,-162.5)
  Bottom Layer w7: 770,-150 775,-145 791.69,-145 v1(809.19,-162.5)
  Bottom Layer w10: R14.1@770,-167.5 770,-150
NetR23_2: R23.2 U5.5 U5.6 | length 76.6
  Bottom Layer w10: R23.2 232.72,-90.31 236.81,-94.41 280.47,-94.41 281.38,-95.32 U5.6 U5.5
NetR24_2: R24.2 U4.14 U5.2 | length 2106
  Mid-Layer 1 w10: v1(111.04,280) 111.04,282.71 116.04,287.71 116.04,290.17 124.83,298.96 1199.07,298.96 1218.32,279.7 v1(1218.32,194.12)
  Mid-Layer 2 w10: v1(111.04,280) 111.04,277.29 116.04,272.29 116.04,209.83 141,184.87 141,-101 v1(165,-125)
  Bottom Layer w7: U4.14 1107.52,89.29 1129.2,89.29 1135.69,95.78 1135.69,143.29 1179.02,186.62 1210.82,186.62 v1(1218.32,194.12)
  Bottom Layer w10: v1(165,-125) 165,-107.65 205.17,-67.47 290.74,-67.47 307.66,-84.4 307.66,-101.56 320.32,-114.22 334.34,-114.22 U5.2 335.28,-114.84 384.84,-114.84 R24.2
NetR25_1: R25.1 R26.2 U4.17 | length 1379.3
  Top Layer w7: v1(1150,35) 1171.81,13.19 1171.81,-176.13 1199.64,-203.96 1199.86,-203.96 1218.96,-223.05 v1(1218.96,-250)
  Top Layer w10: v1(411.82,-276.82) 411.82,-274.11 415,-270.93 415,-177.91 v1(416.91,-176)
  Mid-Layer 1 w10: v1(411.82,-276.82) 435.2,-300.2 1197.82,-300.2 1218.96,-279.07 v1(1218.96,-250)
  Bottom Layer w7: U4.17 1141.01,29.53 1146.48,35 v1(1150,35)
  Bottom Layer w10: v1(416.91,-176) 418.3,-174.61 418.3,-151.39 R25.1 419.68,-115 R26.2
NetR25_2: R25.2 U5.3 | length 51.5
  Bottom Layer w10: U5.3 338.62,-134.68 353.94,-150 R25.2
NetU4_38: U4.38 U7.2 | length 714.8
  Bottom Layer w7: U7.2 196.78,-5.16 203.25,1.31 278.69,1.31 311.14,-31.14 354.32,-31.14 356.7,-33.52 416.12,-33.52 443.31,-60.71 443.31,-61.55 463.46,-81.69 517.1,-81.69 614.18,-81.69 640.8,-108.31 781.69,-108.31 801.42,-88.58 U4.38
NetU4_45: U4.45 Y1.1 | length 103.2
  Bottom Layer w7: Y1.1@740,45.79 743.43,49.21 U4.45@841.77,49.21
NetU4_46: U4.46 Y1.2 | length 144.2
  Bottom Layer w7: Y1.2@735,139.21 742.87,131.34 742.87,117.13 791.1,68.9 U4.46@841.77,68.9
P1.0: U4.1
P1.1: U4.2
P1.2: U4.3
P3.0: J2.2 U4.4 | length 1232.3
  Top Layer w7: v1(200,145) 304.23,145 331.01,171.78 375.76,171.78 400.3,196.32 710.5,196.32 v1(711.34,195.47)
  Mid-Layer 2 w7: v1(200,145) 200,-135 255,-190 255,-240 J2.2
  Bottom Layer w7: v1(200,145) v1@200,145.42 ; J2.2@263.27,-249.81 264.81,-249.81 J2.2 ; v1(711.34,195.47) 713.83,192.99 728.36,192.99 735.34,186 760.4,186 776.94,202.54 902.46,202.54 920.79,184.21 U4.4
P3.1: J2.3 U4.5 | length 1639.2
  Mid-Layer 2 w7: v1(195,177.5) 195.34,177.84 210.34,177.84 217.59,170.59 221.06,170.59 225.17,166.49 225.17,-125.16 335.22,-235.22 335.39,-235.22 350.17,-250 J2.3 ; v1(717.24,224.89) 717.24,222.76 737.46,202.54 887.54,202.54 915,230 v1(915,271)
  Bottom Layer w7: v1(195,177.5) 179.86,192.64 179.86,198.44 183.96,202.54 204.55,202.54 212.46,210.45 212.46,295.9 216.56,300 689.5,300 712.46,277.04 712.46,236.45 714.76,234.15 714.76,227.37 v1(717.24,224.89) ; v1(915,271) 915,220.26 940.47,194.79 U4.5
P3.2: J2.4 U4.6 | length 1669.2
  Top Layer w7: v1(226.91,193.09) 226.91,196.61 215.9,207.62 215.9,290.9 222.46,297.46 989.43,297.46 1015,271.88 v1(1015,271)
  Mid-Layer 2 w7: v1(226.91,193.09) 226.91,190.6 240.17,177.35 240.17,149.37 240.26,149.28 240.26,-119.04 321.21,-200 402.31,-200 452.31,-250 J2.4
  Bottom Layer w7: U4.6 960.16,175.16 1015,230 v1(1015,271)
P3.3: J2.5 U4.7 | length 1227.7
  Top Layer w7: J2.5 565,-264.83 600.17,-300 982.11,-300 1017.54,-264.57 1017.54,-230.34 1018.5,-229.39 1018.5,-146.5 v1(1065,-100)
  Mid-Layer 2 w7: v1(888.47,101.08) 888.47,99.03 875,85.56 875,32.14 847.79,4.93 847.79,-78.17 877.31,-107.69 1054.4,-107.69 1062.09,-100 v1(1065,-100)
  Bottom Layer w7: v1(888.47,101.08) 889.55,100 961.85,100 977.83,115.98 977.83,134.8 U4.7
P3.4: J2.6 U4.27 | length 542.3
  Mid-Layer 2 w7: J2.6 674.78,-259.78 674.78,-284.78 690,-300 982.11,-300 1012.46,-269.66 1012.46,-265.34 1017.54,-260.26 1017.54,-230.34 1020,-227.89 1020,-197.71 v1(1042.71,-175)
  Bottom Layer w7: U4.27 1040.91,-138.82 1040.91,-173.2 v1(1042.71,-175)
P3.5: J2.7 U4.28 | length 419.4
  Bottom Layer w7: J2.7 765,-255.19 809.81,-300 982.11,-300 1012.46,-269.66 1012.46,-265.34 1017.54,-260.26 1017.54,-230.34 1019.21,-228.67 U4.28
P3.6: J2.8 U4.29 | length 208.1
  Top Layer w7: J2.8 897.06,-217.94 927.06,-217.94 960,-185 v1(995,-185)
  Bottom Layer w7: v1(995,-185) 995,-181.48 999.53,-176.95 999.53,-139.41 1000.83,-138.11 U4.29
P3.7: J2.9 U4.30 | length 119.3
  Bottom Layer w7: J2.9 971.5,-243.5 971.5,-175.27 979.84,-166.92 U4.30
P4.7: U4.8
PJ.0: U4.12
PJ.1: U4.13
RST: R22.1 SBW1.2 U4.23 | length 137
  Bottom Layer w10: U4.23@1115.39,-88.58 1115.9,-88.07 1158.92,-88.07 ; R22.1 1150,-96.99 1158.92,-88.07 ; SBW1.2 1201.93,-88.07 1158.92,-88.07
RX: U3.1 U4.39 | length 423.8
  Top Layer w7: U3.1 454.89,-57.6 462.49,-50 v1(465,-50)
  Bottom Layer w7: v1(465,-50) 480,-65 618.7,-65 647.01,-93.31 771.69,-93.31 796.1,-68.9 U4.39
SPI_CS: J1.6 U4.10 | length 618.5
  Mid-Layer 2 w7: J1.6@654.64,239.64 J1.6 669.45,245.55 669.45,205.54 720,155 970,155 v1(1070,55)
  Bottom Layer w7: U4.10 1038.9,108.78 1070,77.68 v1(1070,55)
SPI_SCK: J1.7 U4.11 | length 747.5
  Bottom Layer w7: J1.7 815,300 1195.9,300 1215,280.9 1215,222.61 1194,201.62 1116.62,201.62 1094.63,179.63 1069.63,179.63 1060.59,170.59 1060.59,138.82 U4.11
SPI_SDI: J1.4 U4.25 | length 992.5
  Mid-Layer 2 w7: J1.4 512.46,202.54 612.75,202.54 636.39,178.91 636.39,27.4 664.94,-1.16 664.94,-63.45 680.18,-78.68 742.47,-78.68 788.79,-125 852.2,-125 872.2,-145 1065,-145 1075,-155 v1(1075,-190)
  Bottom Layer w7: v1(1075,-190) 1076.63,-188.37 1076.63,-138.44 U4.25
SPI_SDO: J1.5 U4.24 | length 943.6
  Mid-Layer 2 w7: J1.5 576.66,238.34 601.66,238.34 654.64,185.36 654.64,30.36 672.32,12.68 741.08,12.68 756.31,-2.55 756.31,-71.31 795,-110 858.41,-110 878.41,-130 1084.03,-130 1104.03,-150 v1(1104.03,-182.45)
  Bottom Layer w7: v1(1104.03,-182.45) 1104.03,-178.93 1106.81,-176.15 U4.24
TEST: SBW1.3 U4.22 | length 103.7
  Bottom Layer w10: U4.22@1115.39,-68.9 1139.19,-68.9 1139.29,-69 1171,-69 SBW1.3
UART_RX: J2.11 U4.21 | length 255.7
  Mid-Layer 2 w7: v1(1149.31,-45) 1149.31,-234.31 J2.11
  Bottom Layer w7: U4.21 1108.82,-47.2 1147.11,-47.2 v1(1149.31,-45)
UART_TX: J2.10 U4.20 | length 357.6
  Mid-Layer 2 w7: J2.10 1075,-250 1126.81,-198.19 1126.81,-15.47 v1(1147.4,5.11)
  Bottom Layer w7: U4.20 1108.82,-27.52 1127.64,-27.52 1146.83,-8.33 1146.83,4.54 v1(1147.4,5.11)
VBOOST: C1.2 C2.2 C3.2 J1.8 R1.2 R3.2 R23.1 U1.19 U5.4 | length 1095.2
  Top Layer w10: R1.2@514.53,-128.19 514.53,-150.79 R3.2 515,-159.69 v1(515,-215) ; R1.2 505,-119.69 500.19,-114.87 500.19,-65.09 507.8,-57.47 532.12,-57.47 549.59,-40 v1(550,-40)
  Top Layer w12: U1.19@690.92,38.77 690.92,63.76
  Top Layer w20: C2.2 C3.2 ; v1@677.14,77.54 690.92,63.76 ; 677.14,101.81 701.81,101.81 723.62,123.62 723.62,146.22 731.18,153.78 731.18,165.59 736.41,170.82 736.41,173.64 757.77,195 810,195 J1.8
  Bottom Layer w7: R23.1 231.97,-129.68 R23.1@236.81,-134.53
  Bottom Layer w10: R23.1@236.81,-134.53 242.51,-134.53 242.67,-134.68 288.39,-134.68 289.29,-135.59 289.29,-136.83 352.46,-200 484.24,-200 497.32,-213.09 513.09,-213.09 v1(515,-215) ; v1(550,-40) 550,-5 642.74,87.74 675.23,87.74 v1(677.14,85.83)
Vrect: C4.2 C5.2 Cp1.1 D1.2 D2.2 L1.1 U1.2 | length 420
  Top Layer w10: L1.1@467.39,2.97 469.14,2.97 481.2,-9.09 519.09,-9.09 524.19,-14.19 558.13,-14.19 563.23,-19.29 615.23,-19.29 621.21,-13.31 U1.2
  Top Layer w20: D1.2 245.12,82.4 262.68,64.84 275,64.84 306.81,64.84 309.26,62.4 313.19,62.4 315,60.59 D2.2 ; D2.2@315,61.65 315,62.87 316.81,64.69 C4.2 C5.2 436.89,64.69 440.89,68.69 L1.1@440.89,75.47
VREG: C15.2 J1.10 R10.2 R11.2 R18.2 R19.2 R22.2 SBW1.4 U4.37 U4.48 U6.5 U7.1 | length 1491.8
  Top Layer w20: R11.2 945.31,167.74 973.62,196.04 1001.45,196.04 1055.4,250 J1.10
  Mid-Layer 2 w7: SBW1.4 1171.81,-18.19 1171.81,-171.81 1180,-180 v1(1207.5,-180)
  Mid-Layer 2 w20: 1185,45 1185,35 SBW1.4
  Bottom Layer w10: U7.1 175.12,86.18 229.52,140.58 229.52,159.52 271.04,201.04 285.28,201.04 292.32,208.09 303.09,208.09 v1(305,210) ; R19.2@479.69,-11.65 v1@498.95,-30.92 ; R19.2 R18.2 ; U4.37 833.7,-107.76 850.16,-107.76 850.84,-107.08 855.32,-107.08 870.29,-92.11 v1(870.29,-50.09) ; R22.2 1150.16,-169.84 1172.19,-169.84 1182.35,-180 v1(1207.5,-180)
  Bottom Layer w15: 316.37,199.7 317.52,198.54 583.83,198.54 584.38,199.09
  Bottom Layer w20: v1(305,210) 306.07,210 316.37,199.7 ; 317.52,198.54 326.68,189.39 U6.5@326.68,171.81 ; R19.2@479.69,-11.65 R19.2 ; 584.38,199.09 v1(612.36,171.12) 671.78,171.12 v1(685.38,157.52) ; U4.48@828.16,113.3 828.16,161.82 839.69,173.35 C15.2 869.96,175 v2(875,180.04)
  other v1: 498.95,-34.09
pads on no net: U2.4 U4.15 U4.18 U4.19 U4.26 U4.33 U4.35 U4.40 U4.43 U6.3 U6.4 U6.7
copper on no net:
  other v3: 325.63,94.32 288.23,114 363.03,114 325.63,133.68

## Polygon pours and split planes (outlines as drawn)
GND on Top Layer "GND_L-01_P-001" (solid, remove dead copper, pour order 4): 85.87,327.12 85.87,-324.13 85.82,-327 cw(c151.48,-486.47) 151.48,-314.01 151.48,-314.15 1246,-314.15 1246,314.15 151.48,314.15 cw(c151.48,486.61)
VREG on Mid-Layer 2 "VREG_L-01_P-001" (solid, remove dead copper, pour order 7): 85.82,327.1 85.82,-324.14 85.77,-327.01 cw(c151.43,-486.49) 151.43,-314.03 151.43,-314.16 1246,-314.16 1246,314.14 151.43,314.14 cw(c151.43,486.6)
GND on Bottom Layer "GND_L-01_P-001" (solid, remove dead copper, pour order 8): 85.79,327.07 85.79,-324.17 85.74,-327.04 cw(c151.4,-486.51) 151.4,-314.05 151.4,-314.19 1246,-314.19 1246,314.11 151.4,314.11 cw(c151.4,486.57)
GND on Mid-Layer 1 "GND_L02_P009" (solid, remove dead copper, pour order 9): 85.87,327.12 85.87,-324.13 85.82,-327 cw(c151.48,-486.47) 151.48,-314.01 151.48,-314.15 1246,-314.15 1246,314.15 151.48,314.15 cw(c151.48,486.61)

## Other copper
Top Layer:
  rectangle net ANT: -33.37,54.29 6,2886.05
  region net GND: 5.37,-55.71 -34,-55.71 -34,-2887.47 5.37,-2887.47
Bottom Layer:
  region net ANT: 32,95 62,52.77 62,10 17,10 -25,41 -38,66 -32,92 -18,104 0,110 18,106
  region net GND: 32,-95.5 62,-53.27 62,-10.5 17,-10.5 -25,-41.5 -38,-66.5 -32,-92.5 -18,-104.5 0,-110.5 18,-106.5

## Silkscreen, mask and mechanical layers (free items; w line width, h text height)
Mechanical 1:
  lines w10: 24.01,2874.27 ccw(c-13.49,2876.77) -50.99,2874.27 -50.99,-2875.73 ccw(c-13.49,-2878.23) 24.01,-2875.73 24.01,-486.47 cw(c196.48,-486.47) 196.48,-314.01 ; 24.01,2874.28 24.01,486.61 ccw(c196.48,486.61) 196.48,314.15 1252,314.15 1252,-314.15 196.48,-314.15
Mechanical 3:
  lines w10: 4065,-775 6335,-775 6335,865 4065,865 4065,-775